# Altium PCB EV_PCB.PcbDoc
Units mm, origin at the board's own origin, x right, y up, seen from the top; angles counter-clockwise.
Board outline 65.2 x 39.7 mm, 2 copper layers (Top Layer, Bottom Layer); 4 components, 6 nets, 17 pads, 0 vias.
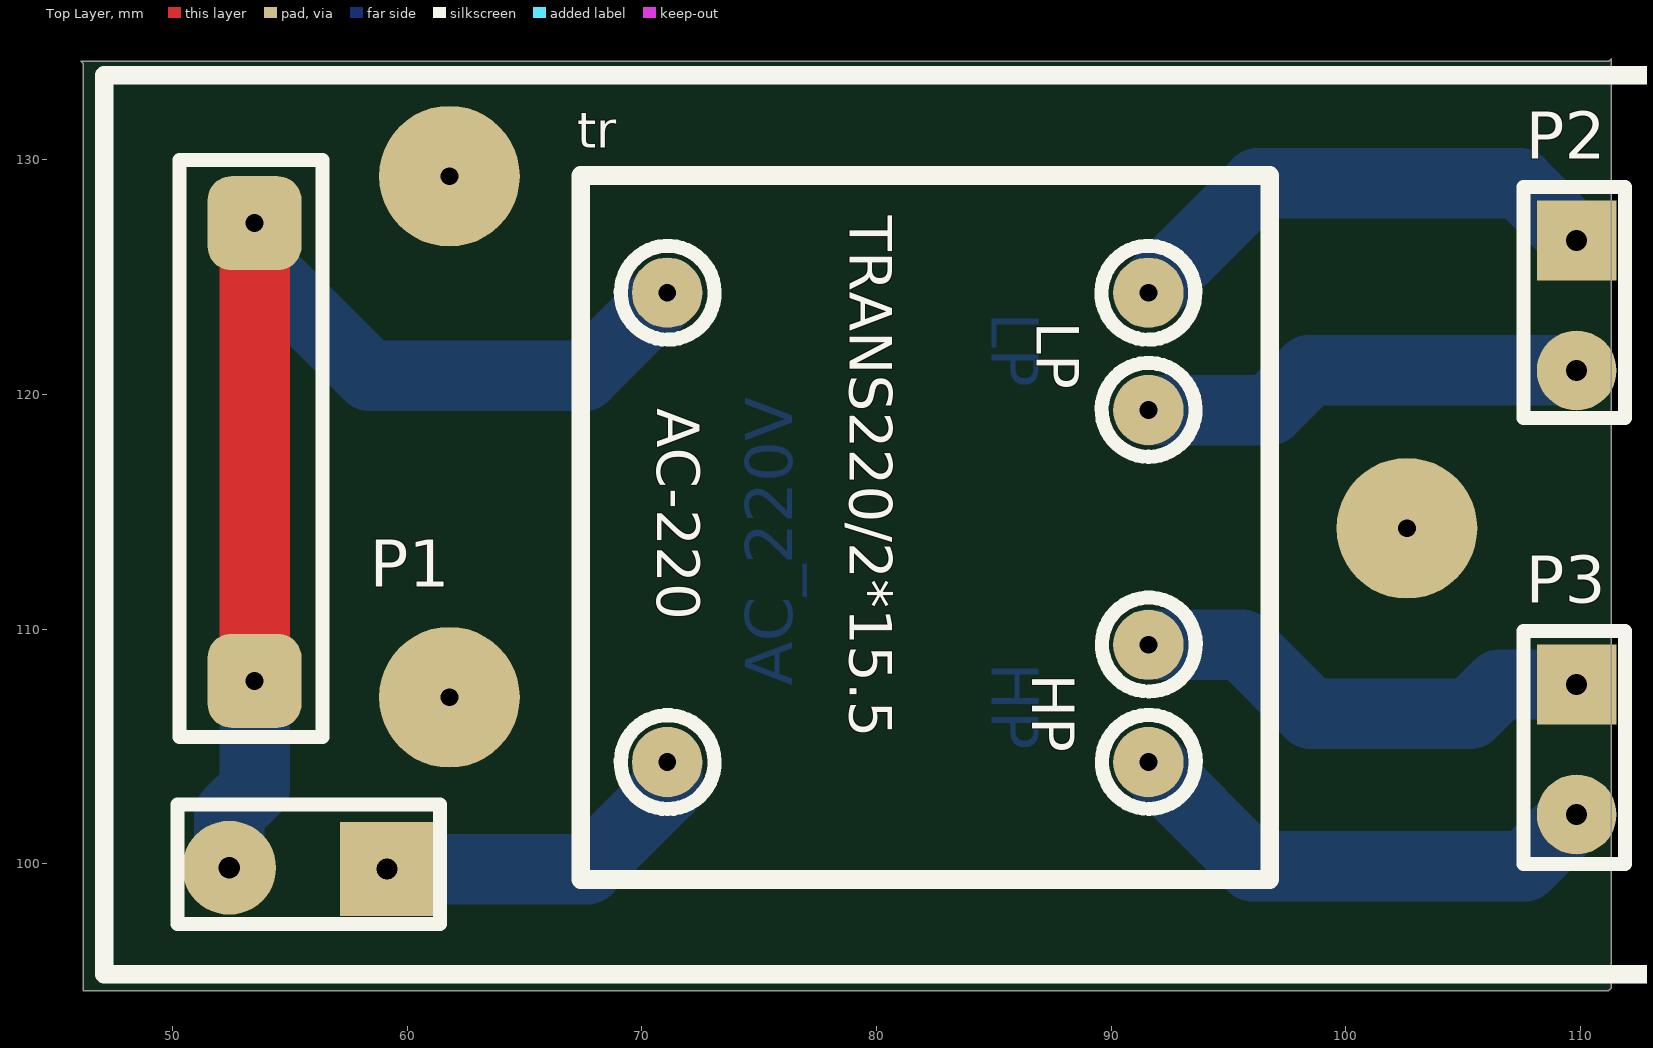
[diagram p0: Top Layer view]
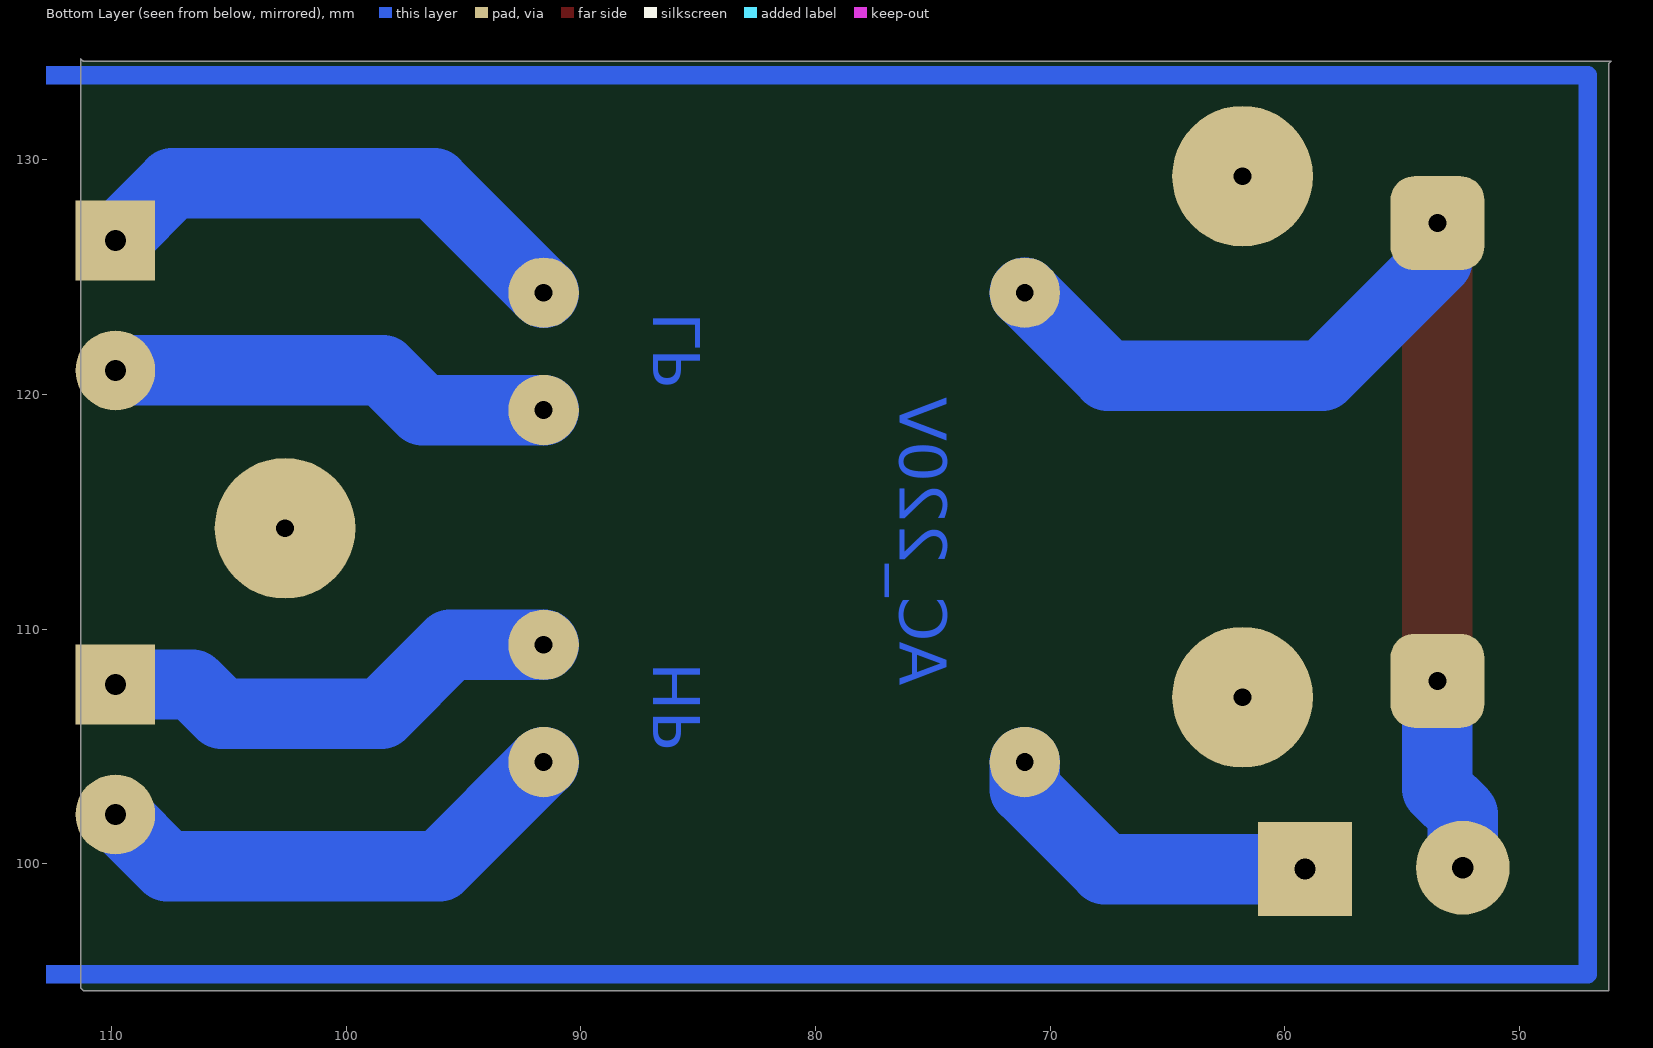
[diagram p1: Bottom Layer view, seen from below]

## Layer stack, top to bottom
Top Layer: signal copper 0.0356
Dielectric: dielectric 0.32, FR-4, Dk 4.8
Bottom Layer: signal copper 0.0356

## Board outline
111.3,134.3 111.3,94.7 111.2,94.6 47.2,94.6 46.2,94.6 46.2,97.5 46.2,134.1 46.1,134.2 50.4,134.2 111.2,134.2 111.3,134.3

## Design rules (kind name [scope] priority, off if disabled: settings)
Clearance [All] p1: gap=0.254
PolygonConnect [All] p1: connectstyle=Relief reliefconductorwidth=0.254 reliefentries=4 polygonreliefangle="90 Angle"
RoomDefinition EV_SH [InComponentClass('EV_SH')] p1: confinementstyle=ConfineIn formatcopy=TRUE lockcomponents=FALSE outline 161.1,31.5 185.1,31.5 185.1,58.2 161.1,58.2
RoutingLayers [All] p1: top layer_v5=FALSE bottom layer_v5=TRUE
RoutingVias [All] p1: holewidth=0.711 width=1.27 viastyle="Through Hole" minholewidth=0.711 minwidth=1.27 maxholewidth=0.711 maxwidth=1.27
SilkscreenOverComponentPads [All] p1: minsilkscreentomaskgap=0.254
SolderMaskExpansion [All] p1: expansion=0.102
Width [All] p1: maxlimit=3.2 minlimit=3 preferedwidth=3.1
26 further rules are at their usual default settings.

## Components (designator, comment, footprint, x,y, rotation, side; value= is the part's Value field where it differs from the comment)
P1 "Header 2" HDR1X2#1 60.136,100.076 r180 top
P2 "Header 2" HDR1X2#2 108.832,127.568 r270 top
P3 "Header 2" HDR1X2#2 108.832,108.644 r270 top
tr "TRANS_2OUT" TRANS_2OUT 79.756,114.808 r270 top

## Footprints (in the part's own frame and the unit in brackets; to place one, negate y for a bottom-side part, rotate by r counter-clockwise, add the part's x,y. Pads: shape width x height; smd on the part's side, far side on the other; paste and mask are expansions set on the pad)
HDR1X2#1 [mm] "Connector; Header; 2 Position"
  rect 4x4 hole 0.9: 1(1,0.3)
  round 4 hole 0.9: 2(7.716,0.24)
  silkscreen extent -1.27,-2.46 9.92,2.64
HDR1X2#2 [mm] "Connector; Header; 2 Position"
  rect 3.4x3.4 hole 0.9: 1(1,1)
  round 3.4 hole 0.9: 2(6.54,1)
  silkscreen extent -1.27,-1.27 8.57,3.07
TRANS_2OUT [mm]
  round 3 hole 0.762: 1(-9.528,-8.673) 2(10.472,-8.673) 3(-9.528,11.827) 4(-4.528,11.827) 5(5.472,11.827) 6(10.472,11.827)
  silkscreen extent -14.53,-12.35 15.47,17

## Part data
P1 P2 P3: "Header, 2-Pin"

## Free pads (board coordinates)
  rrect50% 4x4 hole 0.762: 5(53.5,127.3) 6(53.5,107.8)
  round 6 hole 0.762: 7(61.8,107.1) 7(61.8,129.3) 7(102.6,114.3)

## Nets (pads, with @x,y where several pads share a name; then routed paths per layer and width w, separated by ;. In a path a pad name is that pad's centre, name@x,y a point inside that pad or via, vN(x,y) a via of type N, cw(c..) or ccw(c..) an arc to the next point about the centre after c; other vN are vias at no path point)
NetP1_1: P1.1 tr.2 | length 14.5
  Bottom Layer w3: P1.1 67.676,99.776 71.083,103.183 tr.2
NetP1_2: P1.2 pad.5 pad.6 tr.1 | length 50.6
  Top Layer w3: pad.6 pad.5
  Bottom Layer w3: P1.2 52.42,102.12 53.5,103.2 pad.6 ; pad.5 53.5,125.7 58.4,120.8 67.547,120.8 tr.1
NetP2_1: P2.1 tr.3 | length 21.2
  Bottom Layer w3: tr.3 96.247,129 107.4,129 P2.1
NetP2_2: P2.2 tr.4 | length 18.9
  Bottom Layer w3: tr.4 96.736,119.336 98.428,121.028 P2.2
NetP3_1: P3.1 tr.5 | length 20
  Bottom Layer w3: tr.5 95.564,109.336 98.5,106.4 105.3,106.4 106.544,107.644 P3.1
NetP3_2: P3.2 tr.6 | length 21
  Bottom Layer w3: tr.6 96.019,99.9 107.628,99.9 P3.2
copper on no net: | length 214.9
  Top Layer w0.6: 138.049,25.654 138.049,26.543
  Bottom Layer w0.8: 47.1,95.3 115.8,95.3 115.8,133.6 47.1,133.6 47.1,95.3

## Other copper
Bottom Layer:
  text "LP" at 84.9,123.5 h2 r270
  text "HP" at 84.9,108.6 h2 r270
  text "AC_220V" at 76.4,107.6 h2 r90

## Silkscreen, mask and mechanical layers (free items; w line width, h text height)
Top Overlay:
  lines w0.6: 50.3,105.4 50.3,130 56.4,130 56.4,105.4 50.3,105.4
  lines w0.8: 47.1,95.3 47.1,133.6 115.8,133.6 115.8,95.3 47.1,95.3

## Text inside footprints (layer, text, board x,y; h text height)
tr: Top Overlay "TRANS220/2*15.5" at 78.856,127.608 h1.8 r270; Top Overlay "AC-220" at 70.656,119.408 h1.8 r270; Top Overlay "LP" at 86.836,123.108 h1.8 r270; Top Overlay "HP" at 86.636,108.108 h1.8 r270